# Altium PCB MC14490P_module_PCB.PcbDoc
Units mm, origin at the board's own origin, x right, y up, seen from the top; angles counter-clockwise.
Board outline 42 x 33 mm, 2 copper layers (Top Layer, Bottom Layer), stack 1.569 mm thick; 8 components, 16 nets, 37 pads, 0 vias.
Unrouted connection lines stored in the file: 2.
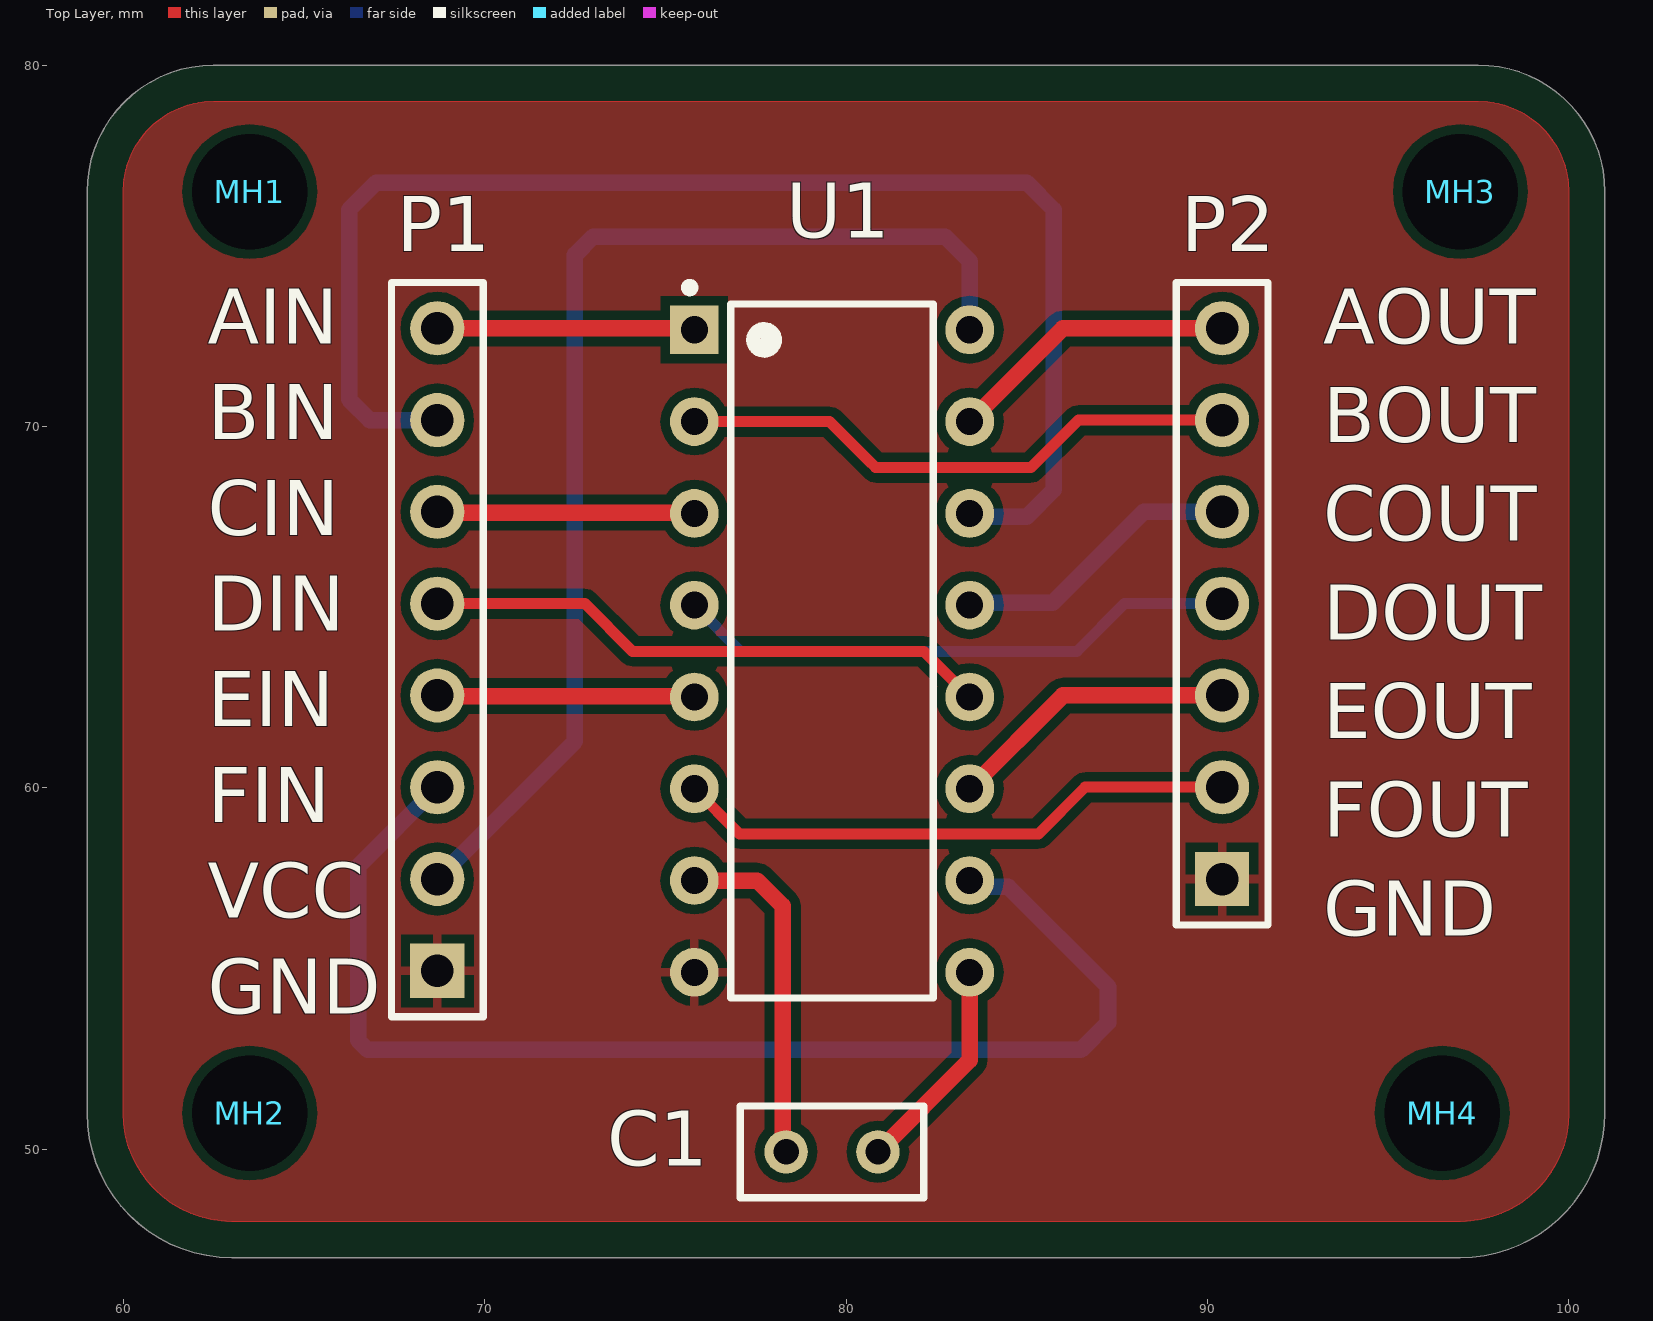
[diagram p0: Top Layer view]
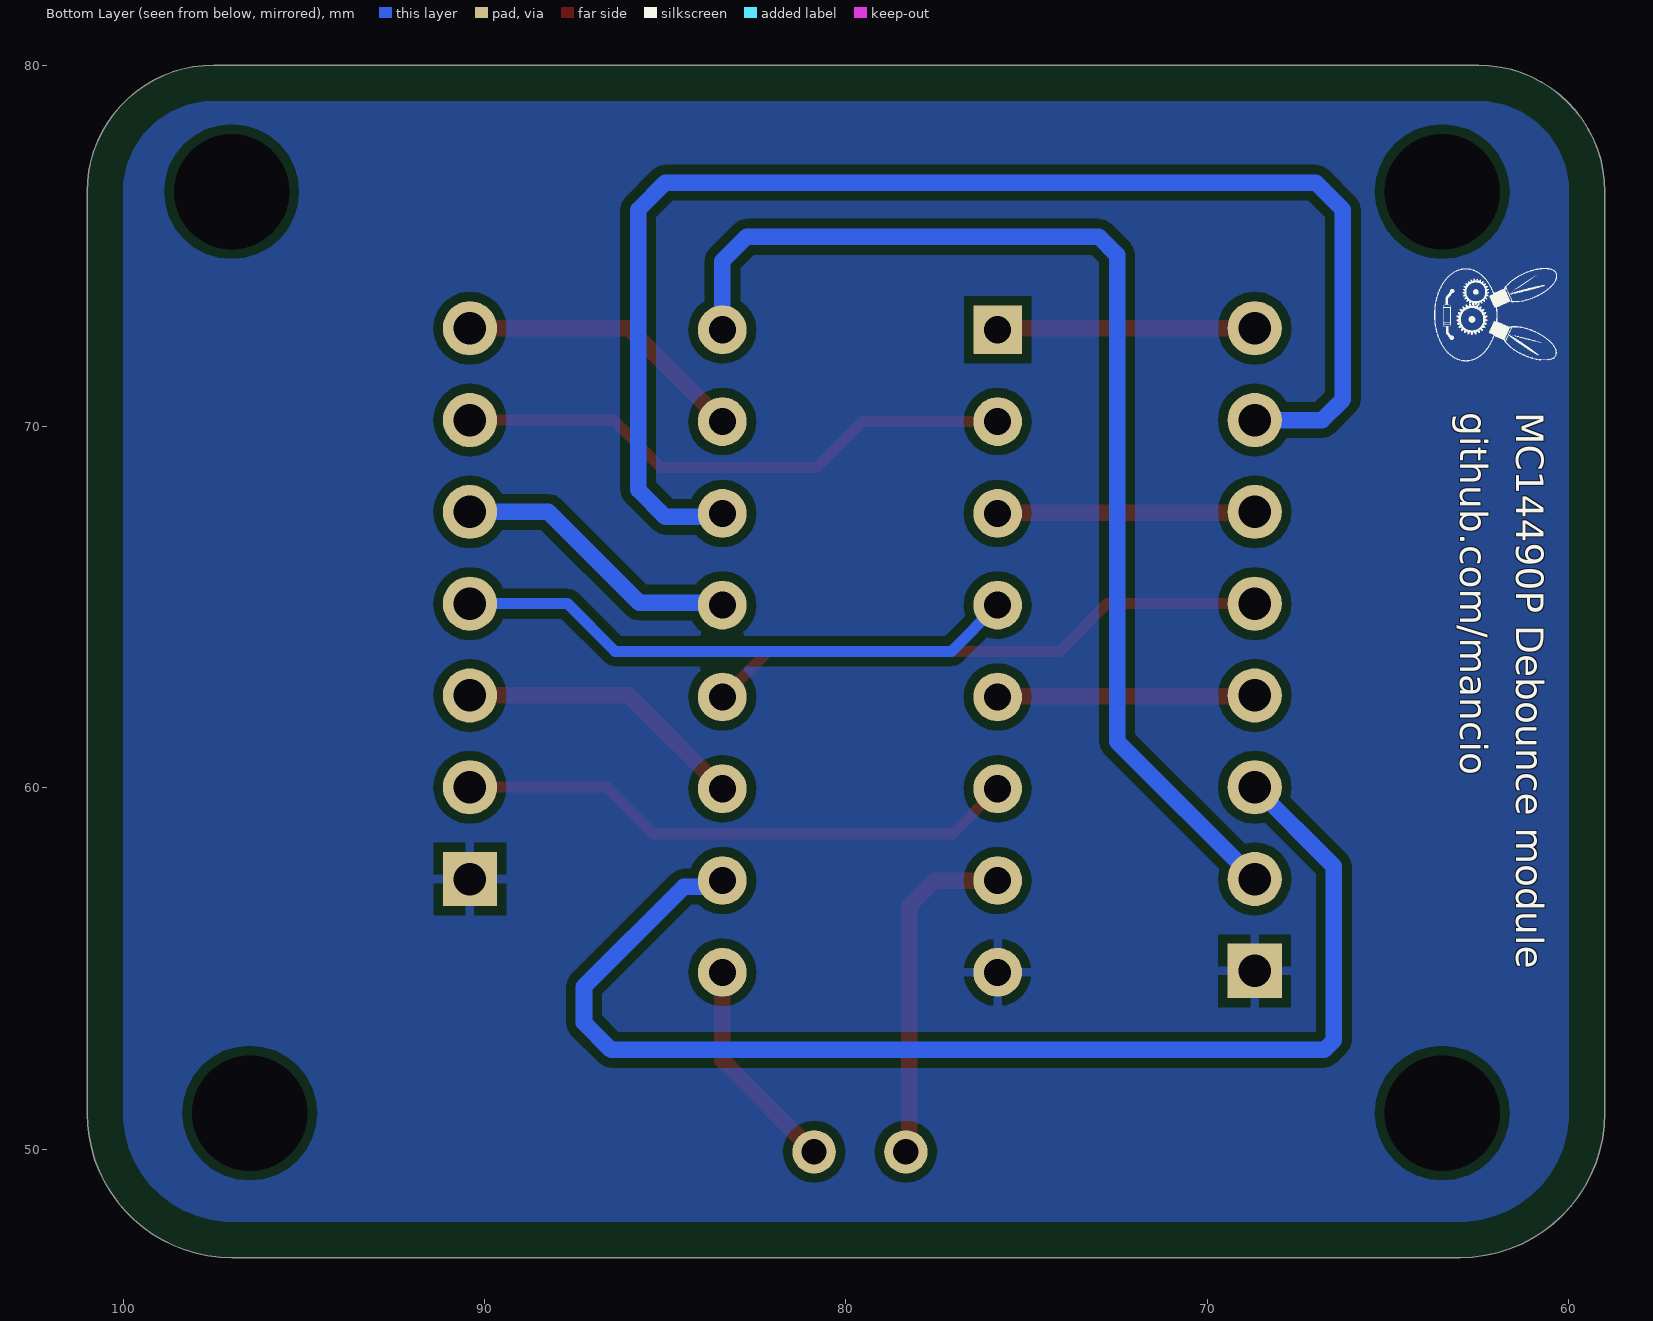
[diagram p1: Bottom Layer view, seen from below]
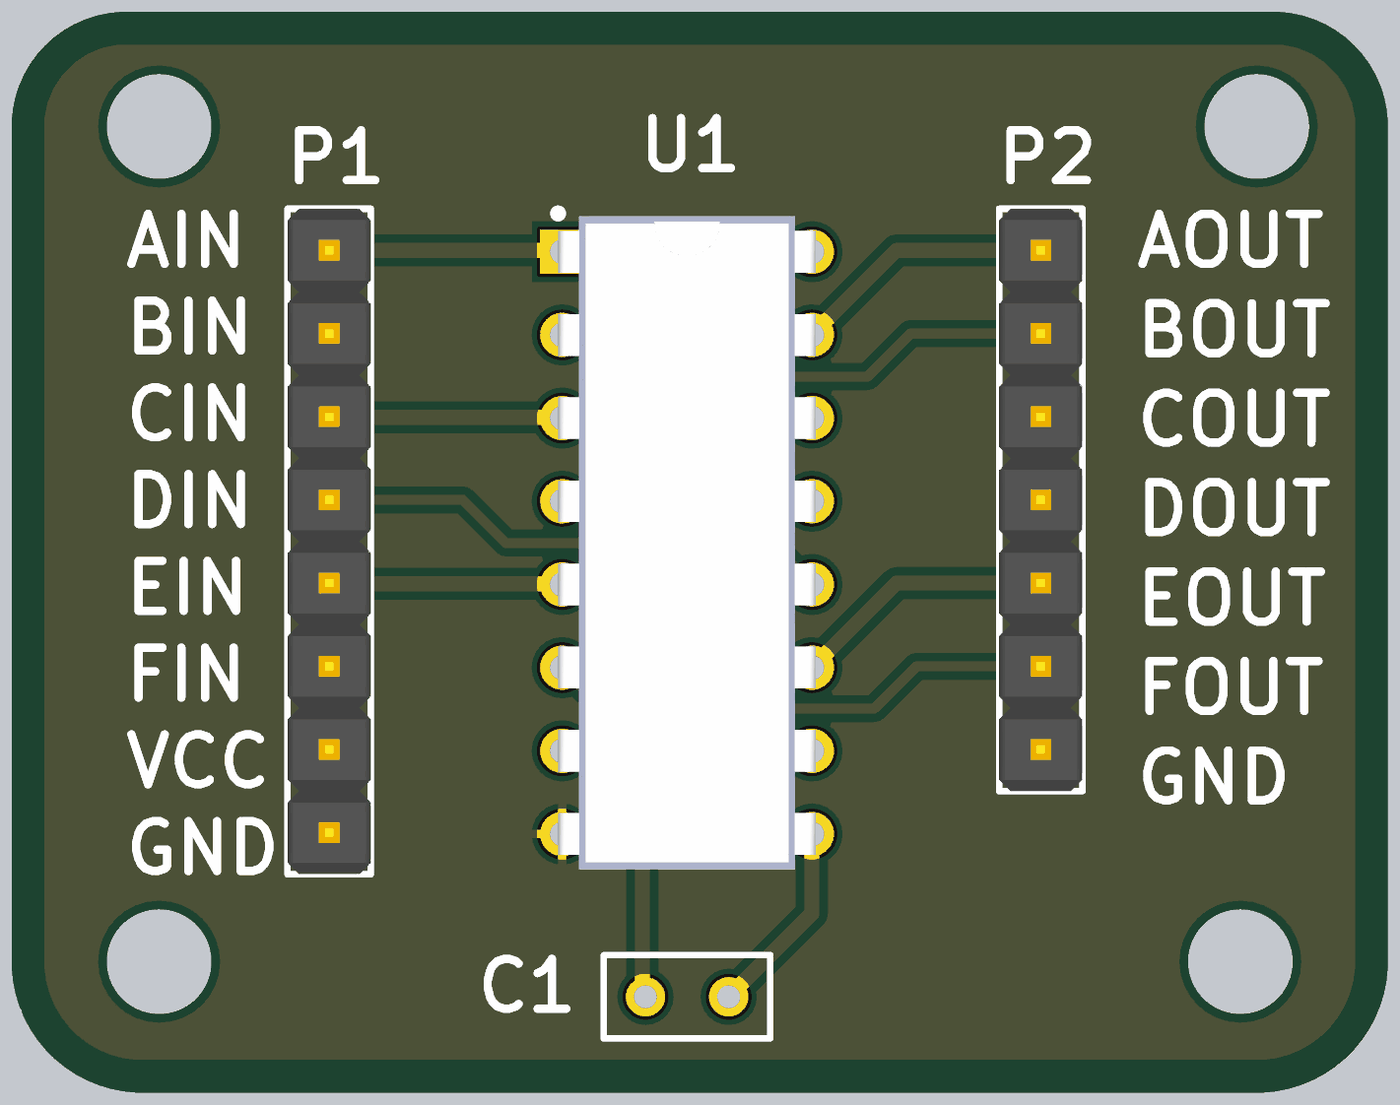
[diagram p2: 3D render of the assembled board from above, using the file's embedded part models]

## Layer stack, top to bottom
Top Solder: solder mask 0.0254, SM-001, Dk 4
Top Layer: signal copper 0.035
Dielectric 1: core 1.4986, Core-043, Dk 4.3
Bottom Layer: signal copper 0.035
Bottom Solder: solder mask 0.0254, SM-001, Dk 4

## Board outline
62.5,80 97.5,80 cw(c97.5,76.5) 101,76.5 101,51 cw(c97,51) 97,47 63,47 cw(c63,51) 59,51 59,76.5 cw(c62.5,76.5)

## Design rules (kind name [scope] priority, off if disabled: settings)
Clearance [All] p1: gap=0.254 ignorepadtopadclearanceinfootprint=FALSE except(0: Arc-Hole Track-Hole SMDPad-Hole THPad-Hole Via-Hole Fill-Hole Poly-Hole Region-Hole Text-Hole)
PolygonConnect [All] p1: connectstyle=Relief reliefconductorwidth=0.254 reliefentries=4 polygonreliefangle="90 Angle" airgapwidth=0.254
RoutingVias [All] p1: holewidth=0.711 width=1.27 viastyle="Through Hole" minholewidth=0.711 minwidth=1.27 maxholewidth=0.711 maxwidth=1.27
SolderMaskExpansion [All] p1: expansion=0.102 istentingtop=FALSE
Width [All] p1: maxlimit=0.61 minlimit=0.254 preferedwidth=0.457
30 further rules are at their usual default settings.

## Components (designator, comment, footprint, x,y, rotation, side; value= is the part's Value field where it differs from the comment)
C1 "Cap" RAD-0.1 79.613,49.927 r0 top value=10nF
MH1 "Mounting Hole 3.2mm Drill" MH_3.2MMD#1 63.5,76.5 r0 top
MH2 "Mounting Hole 3.2mm Drill" MH_3.2MMD#2 63.5,51 r0 top
MH3 "Mounting Hole 3.2mm Drill" MH_3.2MMD#3 97,76.5 r0 top
MH4 "Mounting Hole 3.2mm Drill" MH_3.2MMD#4 96.5,51 r0 top
P1 "Header IN" HDR1X8 68.691,54.938 r90 top
P2 "Header OUT" HDR1X7 90.408,57.478 r90 top
U1 "MC14490P" DIP762W46P254L1918H444Q16P 79.613,63.786 r0 top

## Footprints (in the part's own frame and the unit in brackets; to place one, negate y for a bottom-side part, rotate by r counter-clockwise, add the part's x,y. Pads: shape width x height; smd on the part's side, far side on the other; paste and mask are expansions set on the pad)
DIP762W46P254L1918H444Q16P [mm]
  rect 1.35x1.35 hole 0.75: 1(-3.81,8.89)
  round 1.35 hole 0.75: 2(-3.81,6.35) 3(-3.81,3.81) 4(-3.81,1.27) 5(-3.81,-1.27) 6(-3.81,-3.81) 7(-3.81,-6.35) 8(-3.81,-8.89) 9(3.81,-8.89) 10(3.81,-6.35) 11(3.81,-3.81) 12(3.81,-1.27) 13(3.81,1.27) 14(3.81,3.81) 15(3.81,6.35) 16(3.81,8.89)
  silkscreen extent -4.12,-9.6 2.8,10.24, body extent -3.94,-9.98 3.94,9.98, height 4.7
HDR1X7 [mm] "Connector; Header; 7 Position"
  rect 1.5x1.5 hole 0.9: 1(0,0)
  round 1.5 hole 0.9: 2(2.54,0) 3(5.08,0) 4(7.62,0) 5(10.16,0) 6(12.7,0) 7(15.24,0)
  silkscreen extent -1.27,-1.27 16.51,1.27, body extent -1.27,-1.27 16.51,1.27, height 9.5
HDR1X8 [mm] "Connector; Header; 8 Position"
  rect 1.5x1.5 hole 0.9: 1(0,0)
  round 1.5 hole 0.9: 2(2.54,0) 3(5.08,0) 4(7.62,0) 5(10.16,0) 6(12.7,0) 7(15.24,0) 8(17.78,0)
  silkscreen extent -1.27,-1.27 19.05,1.27, body extent -1.27,-1.27 19.05,1.27, height 9.5
MH_3.2MMD#1 [mil]
  round 60 hole 125.98 unplated: 1(0,0)
MH_3.2MMD#2 [mil]
  round 60 hole 125.98 unplated: 3(0,0)
MH_3.2MMD#3 [mil]
  round 60 hole 125.98 unplated: 2(0,0)
MH_3.2MMD#4 [mil]
  round 60 hole 125.98 unplated: 4(0,0)
RAD-0.1 [mm] "Radial Cap, Thru-Hole; 2 Leads; 0.1 in Pin Spacing"
  round 1.2 hole 0.7: 1(-1.27,0) 2(1.27,0)
  silkscreen extent -2.54,-1.27 2.54,1.27, body extent -2.35,-1.25 2.35,1.25, height 9.35

## Part data
C1: "Capacitor", LatestRevisionDate=17-Jul-2002, LatestRevisionNote="Re-released for DXP Platform.", PackageDescription="Radial Cap, Thru-Hole; 2 Leads; 0.3 in Pin Spacing", PackageReference=RAD-0.3, Published=8-Jun-2000, Publisher="Altium Limited"
MH1 MH2 MH3 MH4: library part MH_3.2MMD
P1: library part "Header 8", "Header, 8-Pin", LatestRevisionDate=17-Jul-2002, LatestRevisionNote="Re-released for DXP Platform.", Publisher="Altium Limited"
P2: library part "Header 7", "Header, 7-Pin", LatestRevisionDate=17-Jul-2002, LatestRevisionNote="Re-released for DXP Platform.", Publisher="Altium Limited"
U1: "Contact Bounce Eliminator IC 16-DIP", Package="DIP-16 ON Semiconductor", Availability=Unavailable, MF="ON Semiconductor", MP=MC14490P, Price=None, SnapEDA_Link=https://www.snapeda.com/parts/MC14490P/ON%20Semiconductor/view-part/4220489/?ref=snap

## Nets (pads, with @x,y where several pads share a name; then routed paths per layer and width w, separated by ;. In a path a pad name is that pad's centre, name@x,y a point inside that pad or via, vN(x,y) a via of type N, cw(c..) or ccw(c..) an arc to the next point about the centre after c; other vN are vias at no path point)
GND: P1.1 P2.1 U1.8 | length 0.1
  Top Layer w0.254: P1.1 P1.1@68.733,54.896
  Top Layer w0.457: P2.1@90.386,57.5 P2.1
NetC1_1: C1.1 U1.7 | length 9.6
  Top Layer w0.457: U1.7 77.546,57.436 78.25,56.732 78.25,50.02 C1.1
NetC1_2: C1.2 U1.9 | length 6
  Top Layer w0.457: C1.2 83.423,52.467 U1.9
NetP1_2: P1.2 U1.16 | length 32.2
  Bottom Layer w0.457: P1.2 72.5,61.287 72.5,74.75 73,75.25 82.75,75.25 83.423,74.577 U1.16
NetP1_3: P1.3 U1.10 | length 35.1
  Bottom Layer w0.457: P1.3 66.5,57.827 66.5,53.018 66.768,52.75 86.5,52.75 87.25,53.5 87.25,54.5 84.485,57.265 83.594,57.265 U1.10
NetP1_4: P1.4 U1.5 | length 7.1
  Top Layer w0.457: P1.4 68.712,62.537 75.782,62.537 U1.5
NetP1_5: P1.5 U1.12 | length 15.9
  Top Layer w0.305: P1.5 72.774,65.098 74.092,63.779 82.16,63.779 U1.12
  Top Layer w0.457: P1.5 P1.5@68.74,65.049
NetP1_6: P1.6 U1.3 | length 7.1
  Top Layer w0.457: P1.6 68.712,67.617 75.782,67.617 U1.3
NetP1_7: P1.7 U1.14 | length 38.5
  Bottom Layer w0.457: P1.7 66.822,70.178 66.25,70.75 66.25,76 67,76.75 85,76.75 85.75,76 85.75,68.25 85,67.5 83.519,67.5 U1.14
NetP1_8: P1.8 U1.1 | length 7.1
  Top Layer w0.254: U1.1@75.761,72.718 U1.1
  Top Layer w0.457: P1.8 U1.1@75.761,72.718
NetP2_2: P2.2 U1.6 | length 15.9
  Top Layer w0.305: U1.6 77.054,58.725 85.323,58.725 86.616,60.018 P2.2
  Top Layer w0.457: P2.2 P2.2@90.608,60.217
NetP2_3: P2.3 U1.11 | length 8.1
  Top Layer w0.457: U1.11 86.005,62.558 P2.3 ; 83.423,65.056 83.479,65
NetP2_4: P2.4 U1.4 | length 15.7
  Bottom Layer w0.305: U1.4 77.08,63.779 86.385,63.779 87.704,65.098 P2.4
NetP2_5: P2.5 U1.13 | length 8.3
  Bottom Layer w0.457: 83.423,59.976 83.594,60.147 ; U1.13 83.493,65.126 85.725,65.126 88.237,67.638 P2.5
NetP2_6: P2.6 U1.2 | length 15.7
  Top Layer w0.305: U1.2 79.546,70.136 80.62,69.062 80.823,68.859 85.115,68.859 86.434,70.178 P2.6
NetP2_7: P2.7 U1.15 | length 8.1
  Top Layer w0.457: U1.15 86.005,72.718 P2.7
pads on no net: MH1.1 MH2.3 MH3.2 MH4.4

## Polygon pours and split planes (outlines as drawn)
GND on Top Layer "GND_LAYER_TOP" (solid, remove dead copper, pour order 3): 62.5,79 97.5,79 cw(c97.5,76.5) 100,76.5 100,51 cw(c97,51) 97,48 63,48 cw(c63,51) 60,51 60,76.5 cw(c62.5,76.5)
GND on Top Layer "NONET_L01_P000" (solid, remove dead copper, shelved, pour order 0): 62.5,79 97.5,79 cw(c97.5,76.5) 100,76.5 100,51 cw(c97,51) 97,48 63,48 cw(c63,51) 60,51 60,76.5 cw(c62.5,76.5)
GND on Bottom Layer "GND_LAYER_BOTTOM" (solid, remove dead copper, pour order 2): 62.5,79 97.5,79 cw(c97.5,76.5) 100,76.5 100,51 cw(c97,51) 97,48 63,48 cw(c63,51) 60,51 60,76.5 cw(c62.5,76.5)

## Silkscreen, mask and mechanical layers (free items; w line width, h text height)
Top Overlay:
  text "AIN" at 62.341,72.295 h1.52
  text "AOUT" at 93.202,72.295 h1.52
  text "BIN" at 62.341,69.646 h1.52
  text "BOUT" at 93.202,69.565 h1.52
  text "CIN" at 62.341,66.997 h1.52
  text "COUT" at 93.202,66.834 h1.52
  text "DIN" at 62.341,64.348 h1.52
  text "DOUT" at 93.202,64.104 h1.52
  text "EIN" at 62.341,61.7 h1.52
  text "EOUT" at 93.202,61.373 h1.52
  text "FIN" at 62.341,59.051 h1.52
  text "FOUT" at 93.202,58.643 h1.52
  text "VCC" at 62.341,56.402 h1.52
  text "GND" at 93.202,55.912 h1.52
  text "GND" at 62.341,53.753 h1.52
Bottom Overlay:
  drawing of 8 lines, arcs and shapes, not listed
  text "MC14490P Debounce module" at 61.458,70.39 h0.76 r90
  text "github.com/mancio" at 63.007,70.39 h0.76 r90
Outline Board (Mech11):
  lines w0.254: 59.004,76.551 59.004,50.842 ccw(c62.907,50.842) 62.907,46.939 97.079,46.939 ccw(c97.079,50.927) 101.067,50.927 101.067,76.635 ccw(c97.641,76.635) 97.641,80.061 62.514,80.061 ; 59.005,76.609 cw(c62.514,76.551) 62.571,80.06